# EAGLE board ATtinyX313_20-QFN (EAGLE 6.3)
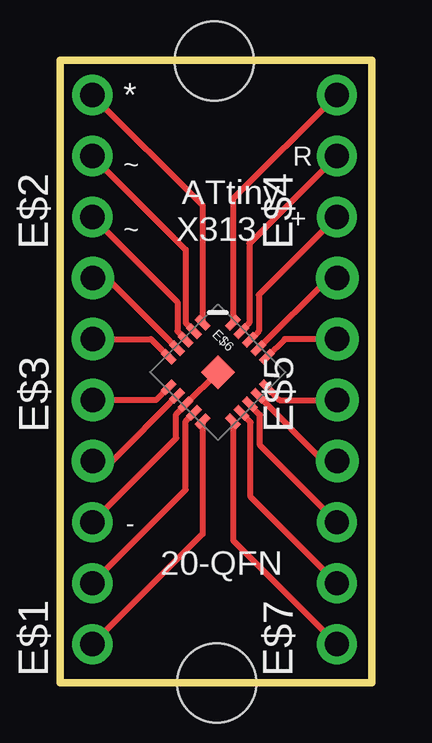
[diagram p0: board, top side]
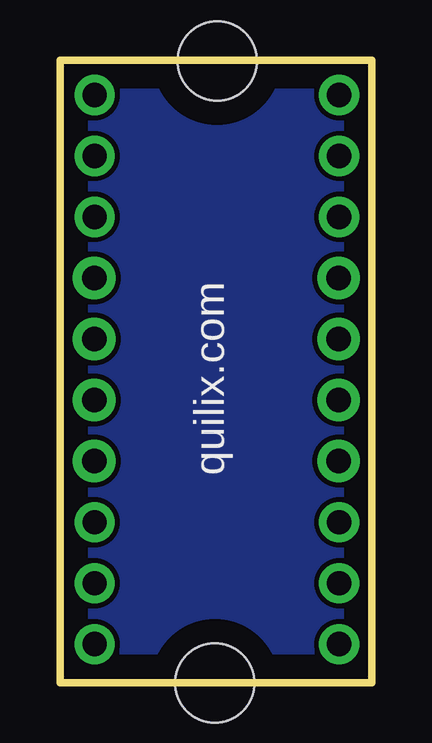
[diagram p1: board, bottom side, seen from below]

Size 13 x 25.95 mm. Coordinates in mm from the lower left corner, seen from the top.
Outline: 13,0 13,25.95 0,25.95 0,0 13,0
Copper layers (1*16): Top 0.035mm / dielectric 1.5mm / Bottom 0.035mm
Design rules "default": minimum track width 10mil, minimum drill 24mil, track to track 8mil, track to pad 8mil, pad to pad 8mil, via to via 8mil, smd to smd 8mil, copper to edge 40mil, drill to drill 8mil, minimum pad ring 10mil, minimum via ring 8mil, stop-mask expansion 4mil, vias tented up to drill 0mil, thermal gap 10mil

## Footprints (pad centres in the part's own frame; a part is rotated, then mirrored left to right if it is on the bottom)
1X03-CLEANBIG = drill 1.016 pad 1.676: 1 -2.54,0; 2 0,0; 3 2.54,0
1X04-CLEANBIG = drill 1.016 pad 1.778: 1 -3.81,0; 2 -1.27,0; 3 1.27,0; 4 3.81,0
QFN20 = smd 1 x 1: 0 0,0 | smd 0.65 x 0.3: 1 -1.9,1; 2 -1.9,0.5; 3 -1.9,0; 4 -1.9,-0.5; 5 -1.9,-1; 11 1.9,-1; 12 1.9,-0.5; 13 1.9,0; 14 1.9,0.5; 15 1.9,1 | smd 0.3 x 0.65: 6 -1,-1.9; 7 -0.5,-1.9; 8 0,-1.9; 9 0.5,-1.9; 10 1,-1.9; 16 1,1.9; 17 0.5,1.9; 18 0,1.9; 19 -0.5,1.9; 20 -1,1.9
STAND-OFF = hole 3.302: 0,0

## Placement (x,y rotation side)
E$1  [1X03-CLEANBIG]  1.35,4.15 90 top
E$2  [1X03-CLEANBIG]  1.35,21.95 90 top
E$3  [1X04-CLEANBIG]  1.37,13.05 90 top
E$4  [1X03-CLEANBIG]  11.55,21.95 90 top
E$5  [1X04-CLEANBIG]  11.57,13.05 90 top
E$6  [QFN20]  6.59,12.94 315 top
E$7  [1X03-CLEANBIG]  11.55,4.15 90 top
JP3  STAND-OFF  [STAND-OFF]  6.44,25.91 90 top
JP4  STAND-OFF  [STAND-OFF]  6.54,-0.01 90 top

## Library data of the parts
E$1-E$5 E$7 = adafruit
E$6 JP3 JP4 = SparkFun

## Nets
S$1: E$1.3 E$6.0 E$6.8
S$2: E$2.3 E$6.1
S$3: E$2.2 E$6.2
S$6: E$2.1 E$6.3
S$7: E$3.4 E$6.4
S$8: E$3.3 E$6.5
S$9: E$3.2 E$6.6
S$10: E$3.1 E$6.7
S$11: E$1.1 E$6.10
S$12: E$1.2 E$6.9
S$13: E$6.11 E$7.1
S$14: E$6.12 E$7.2
S$15: E$6.13 E$7.3
S$16: E$5.1 E$6.14
S$17: E$5.2 E$6.15
S$18: E$5.3 E$6.16
S$19: E$5.4 E$6.17
S$20: E$4.1 E$6.18
S$21: E$4.2 E$6.19
S$22: E$4.3 E$6.20

## Tracks (layer width: path | path; a pad name or v marks a point on that pad's centre or on a via)
PPAD
  pour Bottom: 12.6,25.6 0.35,25.6 0.4,0.35 12.6,0.35
S$1
  Top 0.254: E$1.3 4.85,10.19 4.85,11.2 E$6.8 E$6.0
S$2
  Top 0.254: E$2.3 5.95,19.89 E$6.1
S$3
  Top 0.254: E$2.2 5.25,18.05 5.25,15 5.59,14.65 E$6.2
S$6
  Top 0.254: E$2.1 4.9,15.86 4.9,14.65 5.24,14.31 E$6.3
S$7
  Top 0.254: E$3.4 1.96,16.86 E$6.4
S$8
  Top 0.254: E$3.3 3.79,14.32 E$6.5
S$9
  Top 0.254: E$6.6 4.01,11.78 E$3.2
S$10
  Top 0.254: E$6.7 2.17,9.24 E$3.1
S$11
  Top 0.254: E$6.10 5.95,6.21 E$1.1
S$12
  Top 0.254: E$1.2 5.25,8.05 5.25,10.9 E$6.9
S$13
  Top 0.254: E$6.11 7.22,5.94 E$7.1
S$14
  Top 0.254: E$7.2 7.95,7.75 7.95,10.85 7.58,11.22 E$6.12
S$15
  Top 0.254: E$7.3 8.35,9.89 8.35,11.15 7.93,11.57 E$6.13
S$16
  Top 0.254: E$6.14 11,9.24 E$5.1
S$17
  Top 0.254: E$6.15 9.16,11.78 E$5.2
S$18
  Top 0.254: E$5.3 9.38,14.32 E$6.16
S$19
  Top 0.254: E$5.4 11.21,16.86 E$6.17
S$20
  Top 0.254: E$4.1 8.3,16.16 8.3,14.65 E$6.18
S$21
  Top 0.254: E$4.2 7.9,18.3 7.9,15 7.58,14.68 E$6.19
S$22
  Top 0.254: E$4.3 7.22,20.16 E$6.20

## Text on the board
tSilk: *
_tsilk: ~ | R | ATtiny | ~ | X313 | + | - | 20-QFN
_bsilk: quilix.com